# Altium PCB DAL_DPU.PcbDoc (part 2 of 3)
Units mm, origin at the board's own origin, x right, y up, seen from the top; angles counter-clockwise.
Board outline 93 x 90 mm, 4 copper layers (L1_TOP, L2_GND, L3_POWER, L4_BOT), stack 1.584 mm thick; 234 components, 146 nets, 788 pads, 889 vias.
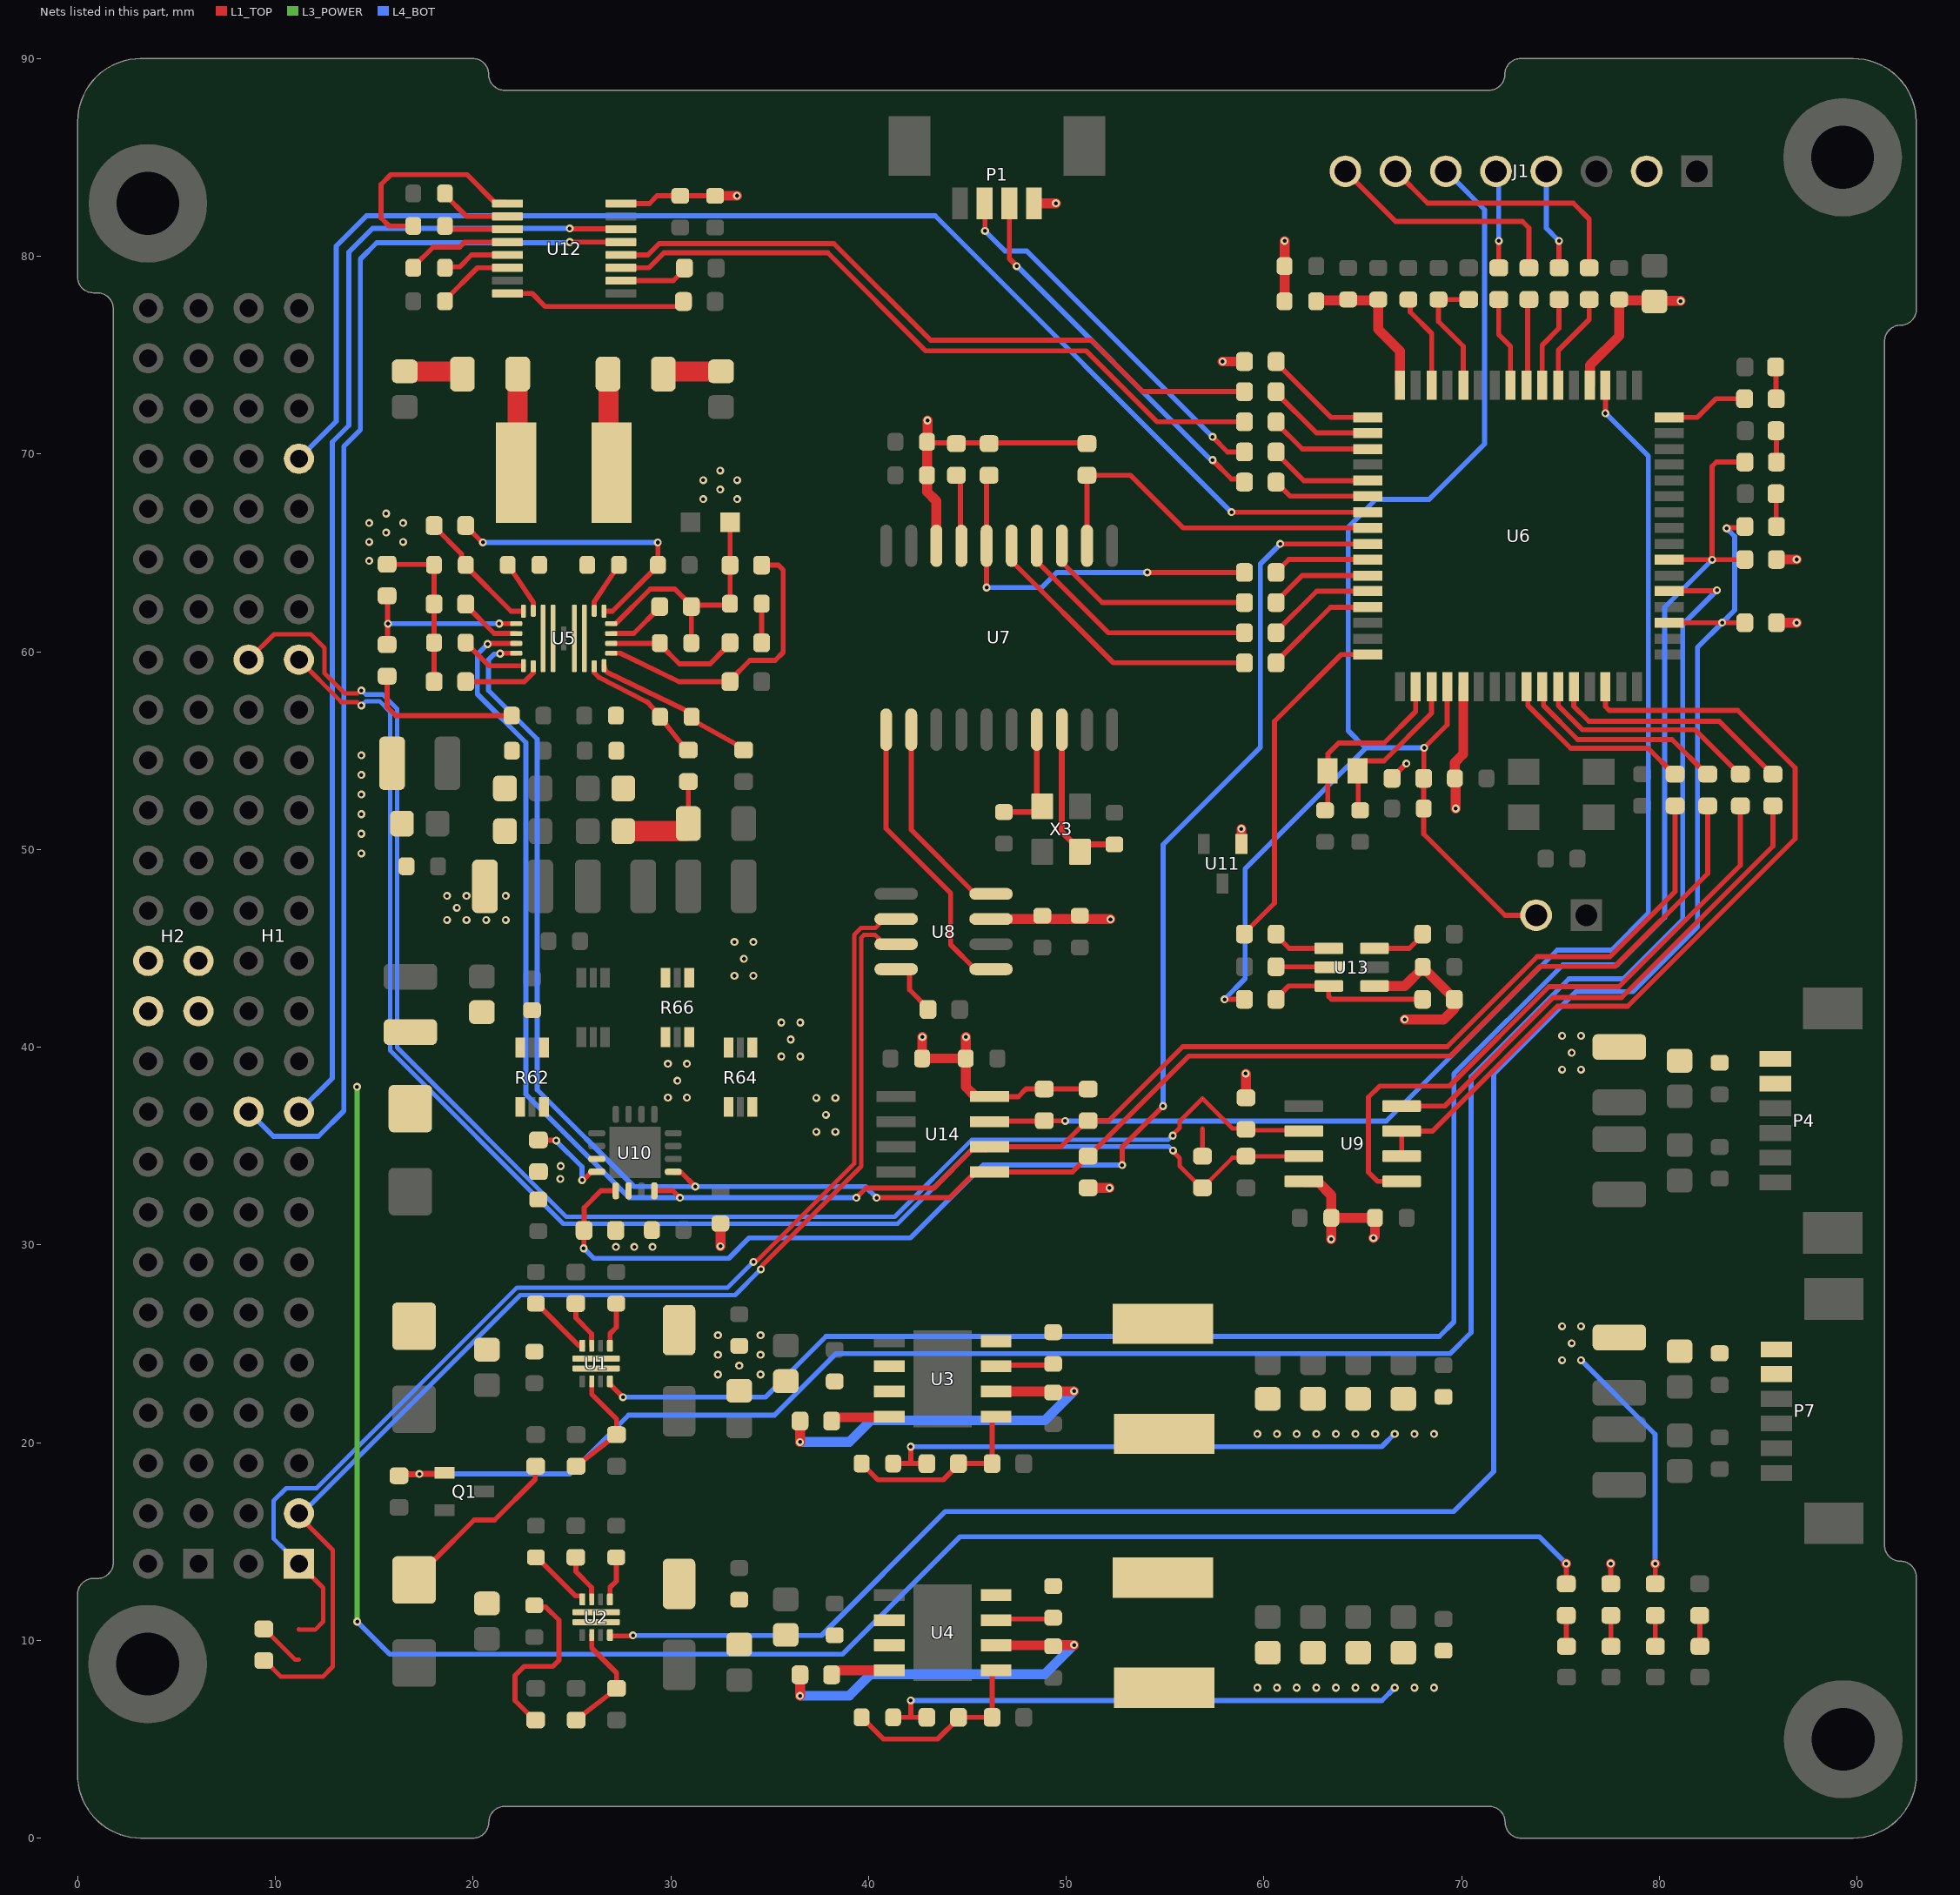
[diagram p4: the nets of this part, all layers, seen from the top]

## Part data
C1 C3 C9 C11 C15 C16 C17 C18 C20 C21 C22 C23 C31 C32 C38 C40 C42 C43 C44 C45 C50 C51 C52 C53 C65 C67 C71 C73 C77 C80 C86 C90 C92 C93 C95 C96 C98 C101 C103 C104 C106 C107: library part _CAP_C_2, "CAP", Voltage=25V
C2 C4 C5 C6 C7 C8 C10 C12 C13 C14 C19 C24 C26 C28 C35 C37 C39 C41 C46 C47 C48 C49 C54 C55 C56 C57 C58 C59 C60 C62 C63 C64 C66 C68 C69 C70 C72 C74 C75 C76 C78 C79 C81 C82 C83 C84 C85 C89 C94 C97 C100 C102 C105 C108: library part _CAP_C_2, "CAP", Voltage=50V
C25 C27 C61 C99: library part _CAP_C_2, "CAP", Voltage=20V
C29 C30: library part _CAP_C_2, "CAP", Voltage=DNP/0.1uF
C33 C34: library part _CAP_C_2, "CAP"
C36: library part _CAP_C_2, "CAP", Voltage=16V
D1 D2: library part "DIODE SCHOTTKY", "DIODE SCHOTTKY"
D3 D4 D14: library part "Diode TVS", "TVS Diode", Voltage=16V, Code - JEDEC=DO-214-AB, Published=8-Jun-2000, Publisher="Altium Limited", Revision="July-2002: Re-released for DXP Platform."
L1 L2: library part Inductor, "Inductor", Voltage=3A
L3: library part Inductor, "Inductor"
L4: library part Inductor, "Ferrite Bread"
NT1: library part NetTie_SMD, "Net Tie SMD"
P1: library part 0532610471
Q1: library part "Mosfet N", "Mosfet N", Voltage=30V
R1 R2 R3 R4 R5 R6 R7 R8 R9 R10 R11 R12 R13 R14 R15 R16 R17 R18 R19 R20 R21 R22 R23 R24 R25 R26 R27 R28 R29 R30 R31 R32 R33 R34 R35 R36 R37 R38 R39 R40 R41 R44 R45 R46 R47 R48 R49 R50 R53 R54 R55 R56 R57 R58 R59 R60 R63 R65 R67 R68 R69 R70 R71 R72 R73 R76 R78 R79 R80 R81 R82 R83 R84 R85 R86 R87 R88: library part _RES_B_2_2, "RES"
R61 R62 R64 R66: library part RSMT1316, "Shunt", Current=8A, Manufacturer 1=SUSUMU, Manufacturer Part Number 1=KRL1632E-M-R010-F-T5, Operating Temperature="-55C to +155C", Package=1206, Power=0.75W, Supplier Part Number 1=408-1570-1-ND, Temperature Coeffcient=50ppm/C, Tolerance=1%, Category=Resistor, ComponentLink1Description="SVN Datasheet", ComponentLink1URL=https://chn-vm-apps.microchip.com/mchprepo/parts/Datasheets/n_catalog_partition09_en.pdf, ComponentLink2Description="Local Datasheet", ComponentLink2URL=C:\ALTIUM_WORK\00001_MCHP-CDB\Datasheets\n_catalog_partition09_en.pdf, ComponentLink3Description="Open Symbol", ComponentLink3URL="C:\ALTIUM_WORK\00001_MCHP-CDB\Library\LibraryRefs\Shunt 4 Pin.SchLib", ComponentLink4Description="Open Footprint", ComponentLink4URL=C:\ALTIUM_WORK\00001_MCHP-CDB\Library\Footprints\RES_C_1206_SHUNT.PcbLib, ComponentLink5Description="Open Footprint 2", ComponentLink6Description="Open Footprint 3", ComponentLink7Description="Open Footprint 4", Composition=MF, Description_="RES SHUNT MF 0.01R 1% 0.75W SMD 1206", Dev Tools Status=Design, MCHP-ID=RSMT1316, Owner="Ciprian Abramov", Populated=YES, Quantity Override=1, Revision=1, Status="MCL Design", Supplier 1=Digi-Key, Symbol="Shunt 4 Pin", TYPE="RES SMD"
SB1 SB2: library part JUMPER
U5: library part TPS55289-Q1
U7: "Stand-Alone CAN Controller with SPI Interface"
X2: library part OSC_32.768kHz, "Crystal", Load Capacitance=12.5pF, Manufacturer 1=NDK, Manufacturer Part Number 1=NX2012SA-32.768K-STD-MUB-1, Supplier Part Number 1=644-1219-1-ND, Tolerance=±20ppm, Category=Crystal/Oscillator, ComponentLink1Description="SVN Datasheet", ComponentLink1URL=https://chn-vm-apps.microchip.com/mchprepo/parts/Datasheets/c_NX2012SA-STD-MUB-1_e.pdf, ComponentLink2Description="Local Datasheet", ComponentLink2URL=C:\ALTIUM_WORK\00001_MCHP-CDB\Datasheets\c_NX2012SA-STD-MUB-1_e.pdf, ComponentLink3Description="Open Symbol", ComponentLink3URL="C:\ALTIUM_WORK\00001_MCHP-CDB\Library\LibraryRefs\Crystal 2 Pins.SchLib", ComponentLink4Description="Open Footprint", ComponentLink4URL=C:\ALTIUM_WORK\00001_MCHP-CDB\Library\Footprints\CRYSTAL_NX2012SA.PcbLib, ComponentLink5Description="Open Footprint 2", ComponentLink6Description="Open Footprint 3", ComponentLink7Description="Open Footprint 4", Description_="CRYSTAL 32.768kHz 12.5pF SMD NX2012SA", Dev Tools Status=Production, MCHP-ID=OSC1092, Owner="Jamus Griego", Populated=YES, Quantity Override=1, Revision=1, Status="MCL Design", Supplier 1=Digi-Key, Symbol="Crystal 2 Pins", TYPE=Crystal
X3: library part crystal_4pin
XC1: library part A07-0042, "Fox FQ5032B 12.0MHz SMD crystal 738B-12", Manufacturer="Fox  Electronics", MPN=FQ5032B-12.000, TemperatureRange="0Â°C ~ 70Â°C", Tolerance=Â±30ppm, AN=A07-0042, Height=1,20000004768372, PartGroup="Frequency devices,Crystals,SMD"

## Via types
v1: diameter 0.4, hole 0.2, L1_TOP to L4_BOT, tented both sides, 888 vias
v2: diameter 0.4, hole 0.2, L1_TOP to L4_BOT, 1 vias

## Nets (pads, with @x,y where several pads share a name; then routed paths per layer and width w, separated by ;. In a path a pad name is that pad's centre, name@x,y a point inside that pad or via, vN(x,y) a via of type N, cw(c..) or ccw(c..) an arc to the next point about the centre after c; other vN are vias at no path point)
+5: C61.2 C62.1 C63.1 C67.1 C68.1 C71.2 C72.1 C73.2 C74.2 C75.2 C76.2 C77.2 C78.1 C79.2 C80.2 C85.2 C86.1 C89.1 C90.2 C101.2 C102.2 H2.25 H2.26 J1.2 L4.1 P1.1 R4.1 R6.1 R31.1 R48.1 R49.1 R50.1 R53.2 R54.1 R55.1 R58.2 R63.1 R65.2 R66.2 R69.2 R76.1 R80.2 U6.21 U6.52 U7.18 U8.3 U9.8 U10.2 U10.15 U11.1 U12.16 U13.1 U14.8 | length 82.7
  L1_TOP w0.254: U12.16@27.482,82.666 28.917,82.666 29.308,83.058 C80.2@30.48,83.058 C79.2@32.243,83.058 ; C67.1@42.964,70.612 43.009,70.567 46.057,70.567 R55.1@46.101,70.523 46.139,70.561 51.016,70.561 R54.1@51.054,70.523 ; U14.8@46.126,37.499 47.58,37.499 47.964,37.884 R76.1@48.895,37.884 R50.1@51.114,37.884 ; R48.1@66.485,53.594 66.485,53.631 67.194,54.34 v1(67.207,54.34) ; R80.2@77.546,12.859 v1@77.546,13.876
  L1_TOP w0.5: C79.2@32.243,83.058 v1(33.348,83.058) ; C77.2@32.512,31.077 32.512,29.93 v1(32.515,29.927) ; v1(42.727,40.511) 42.715,40.499 C86.1@42.715,39.429 C89.1@44.92,39.429 ; C67.1@42.964,70.612 C68.1@42.964,68.923 42.964,68.091 43.434,67.621 U7.18@43.434,65.356 ; C67.1@42.986,70.59 v1(42.986,71.695) ; v1(44.932,40.511) 44.92,40.499 C89.1@44.92,39.429 ; U14.8@46.126,37.499 46.097,37.529 45.385,37.529 44.92,37.994 C89.1@44.92,39.429 ; U8.3@46.202,46.482 52.23,46.482 v1(52.243,46.469) ; P1.1@48.375,82.677 v1(49.48,82.677) ; R49.1@51.114,32.889 52.185,32.889 v1(52.197,32.877) ; v1(57.912,74.676) R31.1@59.017,74.676 ; U11.1@58.862,50.276 v1(58.862,51.045) ; v1(59.083,38.661) 59.094,38.651 R58.2@59.094,37.444 ; L4.1@61.049,77.724 v1(61.049,80.772) ; U9.8@62.018,33.215 62.063,33.17 62.753,33.17 63.411,32.511 C73.2@63.411,31.369 ; v1(63.399,30.286) 63.411,30.298 C73.2@63.411,31.369 ; v1(65.543,30.352) 65.621,30.43 C74.2@65.621,31.369 C73.2@63.411,31.369 ; U13.1@65.595,43.097 67.124,43.097 C85.2@68.034,44.007 ; v1(67.124,41.402) 69.093,41.402 69.634,41.943 R69.2@69.634,42.418 ; C85.2@68.034,44.049 C85.2@68.034,44.007 ; C85.2@68.034,44.057 C85.2@68.034,44.007 ; R69.2@69.634,42.449 69.634,42.468 69.459,42.643 69.44,42.643 68.226,43.856 68.184,43.856 C85.2@68.034,44.007 ; v1(69.704,52.07) 69.704,53.594 69.655,53.642 69.655,54.392 70.088,54.824 U6.21@70.088,58.237 ; U6.52@76.489,73.477 76.493,73.481 76.493,74.492 77.978,75.978 C63.1@77.978,77.813 78.028,77.763 79.706,77.763 C61.2@79.756,77.713 ; v1(77.543,13.879) v1@77.546,13.876 ; C61.2@79.788,77.745 v1@81.068,77.745 ; R6.1@85.928,61.462 86.945,61.462 v1(86.948,61.466) ; R4.1@85.928,64.663 86.945,64.663 v1(86.948,64.666)
  other v1: 27.226,29.896 28.155,29.896 29.083,29.896 24.412,33.336 24.433,33.986 29.857,37.449 30.814,37.449 30.336,38.306 29.857,39.163 30.814,39.163 14.351,49.8 14.351,50.793 14.351,51.785 14.351,52.778 14.351,53.77 14.351,54.762 81.084,77.729
+5_SENSE: C20.1 C21.1 C22.1 C23.1 C24.1 C30.1 L2.2 R13.1 R66.1 | length 27.3
  L1_TOP w0.254: C30.1@41.251,6.107 42.062,6.107 ; v1(42.139,6.96) 42.139,6.183 42.062,6.107 ; R13.1@42.953,6.107 42.062,6.107
  L4_BOT w0.254: v1(42.139,6.96) 42.145,6.953 65.97,6.953 v1(66.621,7.605)
  other v1: 59.675,7.605 60.667,7.605 61.659,7.605 62.652,7.605 63.644,7.605 64.637,7.605 65.629,7.605 67.614,7.605 68.606,7.605 33.222,43.61 34.179,43.61 33.701,44.467 33.222,45.324 34.179,45.324
+5_SENSE_TRANS: C15.1 C16.1 C17.1 C18.1 C19.1 C29.1 L1.2 R12.1 R64.1 | length 27.3
  L1_TOP w0.254: C29.1@41.251,18.941 42.062,18.941 ; v1(42.139,19.794) 42.139,19.017 42.062,18.941 ; R12.1@42.953,18.941 42.062,18.941
  L4_BOT w0.254: v1@42.132,19.8 v1(42.139,19.794) 65.964,19.794 v1@66.615,20.445
  other v1: 59.675,20.439 60.667,20.439 61.659,20.439 62.652,20.439 63.644,20.439 64.637,20.439 65.629,20.439 66.621,20.439 67.614,20.439 68.606,20.439 35.589,39.529 36.547,39.529 36.068,40.386 35.589,41.243 36.547,41.243
+5_TRANS: C92.2 C93.2 C94.2 C103.2 C104.2 C105.2 P4.5 P4.6 P7.5 P7.6 R64.2 R78.2 | length 12.9
  L1_TOP w0.254: R78.2@79.794,12.859 v1@79.794,13.876
  L1_TOP w0.5: v1(79.791,13.879) v1@79.794,13.876
  L4_BOT w0.254: v1(76.044,24.168) 79.791,20.421 v1(79.791,13.879)
  other v1: 75.086,24.168 75.565,25.025 75.086,25.882 76.044,25.882 37.367,35.719 38.325,35.719 37.846,36.576 37.367,37.433 38.325,37.433 75.086,38.859 76.044,38.859 75.565,39.716 75.086,40.573 76.044,40.573
+12: C9.2 C10.2 C11.2 C12.2 D3.1 D4.1 R1.2 R2.2 R62.2 U1.5 U2.5 | length 17.8
  L1_TOP w0.254: D4.1@17.018,13.052 17.018,13.089 17.982,14.054 18.02,14.054 20.05,16.084 21.087,16.084 23.146,18.142 23.146,18.783 R1.2@23.166,18.803 ; C12.2@23.101,11.769 23.376,11.769 23.379,11.772 23.379,11.739 23.419,11.699 23.668,11.699 24.34,11.027 24.34,8.986 24.034,8.68 22.582,8.68 22.127,8.225 22.127,6.959 23.116,5.969 R2.2@23.166,5.969
+12_EPS: C98.2 C99.2 C100.2 D14.1 H2.23 H2.24 R62.1 R79.2 | length 92.9
  L1_TOP w0.254: R79.2@75.298,12.859 v1@75.298,13.876
  L1_TOP w0.5: v1(75.295,13.879) v1@75.298,13.876
  L3_POWER w0.254: v1(14.139,10.951) v1@14.139,37.991
  L4_BOT w0.254: v1(14.139,10.951) 15.787,9.303 38.689,9.303 44.626,15.24 73.934,15.24 v1(75.295,13.879)
  other v1: 14.135,37.995
+12_MCU: C3.2 C4.1 C27.1 C28.1 D2.1 U2.6 U4.2 U4.3
+12_TRANS: C1.2 C2.1 C25.1 C26.1 C50.2 C51.2 C52.2 C53.2 C54.2 D1.1 R23.2 U1.6 U3.2 U3.3 U5.7 | length 8
  L1_TOP w0.254: R23.2@15.653,58.763 15.653,57.209 16.093,56.769 C54.2@21.959,56.769
  other v1: 32.385,23.446 34.544,23.446 33.466,23.894 32.385,24.439 34.544,24.439 32.385,25.431 34.544,25.431 18.688,46.431 19.67,46.431 20.662,46.431 21.654,46.431 19.177,47.045 18.688,47.65 19.67,47.65 21.654,47.65
AGND: C39.1 C47.1 C48.1 C49.1 NT1.2 R25.2 R26.1 R27.1 R28.1 R30.1 U5.17 | length 21.5
  L1_TOP w0.254: R25.2@15.653,64.427 15.672,64.408 18.009,64.408 C39.1@18.028,64.389 R26.1@18.028,62.413 C47.1@18.028,60.461 R27.1@18.028,58.485 ; U5.17@26.987,61.42 U5.17@26.987,61.42 27.22,61.419 28.97,63.169 30.209,63.169 31.042,62.336 R28.1@31.042,62.286 ; C48.1@31.042,60.436 R28.1@31.042,62.286 ; NT1.2@33.004,66.548 32.998,66.542 R30.1@32.998,64.376 C49.1@32.998,62.425 32.928,62.355 31.112,62.355 R28.1@31.042,62.286
  other v1: 14.747,64.591 14.747,65.548 16.461,65.548 15.604,66.027 14.747,66.506 16.461,66.506 15.604,66.985 31.647,67.72 33.361,67.72 32.504,68.199 31.647,68.678 33.361,68.678 32.504,69.156
AVCC: C64.1 C65.1 L4.2 U6.64 | length 8
  L1_TOP w0.5: L4.2@62.649,77.724 62.693,77.768 65.741,77.768 C64.1@65.786,77.813 65.786,76.303 66.888,75.201 U6.64@66.888,73.477
CAN_H: H1.03 R57.1 U8.7 | length 61.9
  L1_TOP w0.224: R57.1@9.415,8.979 9.467,8.979 10.276,8.17 12.408,8.17 12.907,8.669 12.907,14.564 11.19,16.281 H1.03@11.19,16.42 ; v1(34.554,28.768) 34.554,28.815 34.643,28.904 34.643,28.981 39.631,33.969 39.631,45.541 39.762,45.672 40.348,45.672 40.53,45.49 40.53,45.386 40.704,45.212 U8.7@41.402,45.212
  L4_BOT w0.224: H1.03@11.19,16.42 11.339,16.42 22.382,27.463 33.25,27.463 v1(34.554,28.768)
CAN_L: H1.01 SB1.1 U8.6 | length 59.1
  L1_TOP w0.224: SB1.1@11.19,10.554 11.208,10.536 12.009,10.536 12.419,10.946 12.419,12.651 H1.01@11.19,13.88 ; v1(34.182,29.14) 34.229,29.14 34.318,29.229 34.395,29.229 39.281,34.115 39.281,45.686 39.617,46.022 40.348,46.022 40.53,46.204 40.53,46.308 40.704,46.482 U8.6@41.402,46.482
  L4_BOT w0.224: H1.01@11.176,13.88 11.176,13.894 10.537,14.533 10.523,14.533 9.904,15.152 9.904,17.054 10.545,17.695 12.079,17.695 22.226,27.841 32.883,27.841 v1(34.182,29.14)
CAN_RX: U7.2 U8.4 | length 10.4
  L1_TOP w0.254: U7.2@42.164,56.056 42.164,50.99 45.402,47.752 U8.4@46.202,47.752
CAN_TX: U7.1 U8.1 | length 14.8
  L1_TOP w0.254: U7.1@40.894,56.056 40.894,51.054 44.16,47.788 44.16,45.184 45.402,43.942 U8.1@46.202,43.942
EFUSE1_MCU_FLT: R4.2 R84.2 U1.4 U6.39 | length 100.6
  L1_TOP w0.254: U1.4@26.927,23.099 26.927,22.949 27.577,22.299 v1(27.583,22.299) ; U6.39@80.502,64.663 80.51,64.655 82.667,64.655 v1(82.674,64.647) ; R4.2@84.328,64.663 84.32,64.655 82.682,64.655 v1(82.674,64.647) ; R84.2@84.328,69.59 82.895,69.59 82.674,69.37 v1(82.674,64.647)
  L4_BOT w0.254: v1(27.583,22.299) 34.791,22.299 37.858,25.367 68.873,25.367 69.615,26.108 69.615,38.654 75.118,44.158 77.876,44.158 80.275,46.557 80.275,62.247 v1(82.674,64.647)
EFUSE2_MCU_FLT: R6.2 R82.2 U2.4 U6.35 | length 107.6
  L1_TOP w0.254: U2.4@26.925,10.271 26.925,10.22 26.936,10.21 26.948,10.222 28.065,10.222 v1(28.092,10.25) ; U6.35@80.502,61.462 80.505,61.465 83.182,61.465 v1(83.185,61.468) 83.188,61.465 84.325,61.465 R6.2@84.328,61.462 ; v1(83.409,66.238) 83.437,66.266 84.26,66.266 R82.2@84.328,66.333
  L4_BOT w0.254: v1(28.092,10.25) 37.622,10.25 43.887,16.514 69.6,16.514 71.628,18.542 71.628,38.648 75.785,42.805 78.668,42.805 81.933,46.07 81.933,60.216 v1(83.185,61.468) 83.82,62.103 83.82,65.827 v1(83.409,66.238)
HeartBeat: R83.2 U6.48 | length 4.2
  L1_TOP w0.254: U6.48@80.502,71.851 81.925,71.851 82.866,72.792 R83.2@84.314,72.792
MCU_CONSOLE_RX: P1.2 R38.2 | length 19.4
  L1_TOP w0.254: P1.2@47.125,82.677 47.125,79.875 v1(47.498,79.502) ; v1(57.404,69.691) 58.363,68.732 58.865,68.732 R38.2@59.017,68.58
  L4_BOT w0.254: v1(47.498,79.502) 47.526,79.502 57.308,69.719 57.376,69.719 v1(57.404,69.691)
MCU_CONSOLE_TX: P1.3 R36.2 | length 19.2
  L1_TOP w0.254: P1.3@45.875,82.677 45.894,82.658 v1(45.894,81.28) ; v1(57.404,70.866) 58.166,70.104 R36.2@59.017,70.104
  L4_BOT w0.254: v1(45.894,81.28) 46.91,80.264 48.006,80.264 v1(57.404,70.866)
MCU_EEPROM_WP: R76.2 U6.51 U14.7 | length 65.3
  L1_TOP w0.254: U14.7@46.126,36.229 46.154,36.257 48.868,36.257 R76.2@48.895,36.284 48.905,36.274 49.942,36.274 v1(49.952,36.263) ; v1(77.273,72.057) 77.275,72.059 77.275,73.475 U6.51@77.276,73.477
  L4_BOT w0.254: v1(49.952,36.263) 66.193,36.263 74.839,44.909 77.597,44.909 79.451,46.763 79.451,69.901 77.295,72.057 v1(77.273,72.057)
MCU_EFUSE_EN: Q1.1 R11.1 U6.37 | length 105.3
  L1_TOP w0.254: U6.37@80.502,63.063 80.526,63.087 82.896,63.087 v1(82.921,63.112)
  L1_TOP w0.305: R11.1@16.256,18.326 16.328,18.398 17.266,18.398 v1(17.285,18.416) 18.498,18.416 Q1.1@18.558,18.476
  L4_BOT w0.254: v1(17.285,18.416) 24.893,18.416 27.868,21.391 35.251,21.391 38.364,24.504 69.423,24.504 70.485,25.566 70.485,38.509 75.429,43.453 78.187,43.453 81.181,46.447 81.181,61.372 v1(82.921,63.112)
MCU_I2C_SCL: R44.2 R50.2 U5.3 U10.4 U14.6 | length 98
  L1_TOP w0.254: v1(20.737,60.385) 20.776,60.385 20.811,60.42 U5.3@22.187,60.42 ; U10.4@29.169,32.736 30.111,32.736 v1(30.464,32.383) ; v1(39.385,32.385) 39.877,32.877 43.32,32.877 45.25,34.807 45.974,34.807 U14.6@46.126,34.959 49.729,34.959 51.054,36.284 R50.2@51.114,36.284 51.164,36.284 52.158,36.284 55.897,40.023 69.269,40.023 73.825,44.579 77.508,44.579 80.799,47.87 R44.2@80.799,52.208
  L4_BOT w0.254: v1(20.737,60.385) 20.219,59.867 20.219,57.857 22.676,55.401 22.676,37.612 27.902,32.385 v1(39.385,32.385)
MCU_I2C_SDA: R45.2 R49.2 U5.4 U10.5 U14.5 | length 97.4
  L1_TOP w0.254: v1(21.367,59.9) 21.386,59.92 U5.4@22.187,59.92 ; U10.5@30.129,33.696 30.162,33.663 30.529,33.663 v1(31.242,32.95) ; v1(40.411,32.385) 44.111,32.385 45.415,33.689 U14.5@46.126,33.689 50.314,33.689 50.766,34.141 50.766,34.145 R49.2@51.11,34.489 ; R49.2@51.114,34.489 51.146,34.489 56.206,39.55 69.437,39.55 73.967,44.079 77.751,44.079 82.45,48.778 R45.2@82.45,52.208
  L4_BOT w0.254: v1(21.367,59.9) 21.348,59.881 21.072,59.881 20.786,59.595 20.786,58.038 23.241,55.583 23.241,37.846 28.137,32.95 v1(31.242,32.95) 39.846,32.95 v1(40.411,32.385)
MCU_MCP2515_CS: R35.1 R55.2 U7.16 | length 19.1
  L1_TOP w0.254: v1(45.974,63.246) 45.974,68.796 R55.2@46.101,68.923 ; v1(54.102,64.008) R35.1@59.017,64.008
  L4_BOT w0.254: v1(45.974,63.246) 48.768,63.246 49.53,64.008 v1(54.102,64.008)
MCU_MCP2515_INT: R54.2 U6.8 U7.12 | length 19.7
  L1_TOP w0.254: U7.12@51.062,64.581 51.054,64.581 U7.12@51.054,65.356 R54.2@51.054,68.923 53.251,68.923 55.911,66.263 U6.8@65.262,66.263
MCU_nRESET: C66.2 J1.6 JP1.2 R48.2 R70.1 U6.20 | length 69.5
  L1_TOP w0.254: v1(58.011,42.418) R70.1@59.017,42.418 ; U6.20@69.275,58.237 69.275,56.303 v1(68.11,55.138) 68.097,55.126 68.097,53.607 R48.2@68.085,53.594 C66.2@68.085,52.07 68.085,50.781 72.193,46.673 JP1.2@73.771,46.673
  L4_BOT w0.254: v1(58.011,42.418) 59.055,43.462 59.055,49.022 65.151,55.118 ; v1(68.11,55.138) 65.131,55.138 64.262,56.007 64.262,66.294 65.667,67.699 68.36,67.699 71.169,70.508 71.169,82.36 69.569,83.96 J1.6@69.569,84.19
MCU_PAC1934_INT: R63.2 U6.9 U10.1 | length 72.6
  L1_TOP w0.254: v1(25.597,29.827) 25.606,29.837 25.606,30.724 R63.2@25.616,30.734 25.616,31.885 26.467,32.736 U10.1@27.219,32.736 ; v1(52.832,34.036) 52.832,34.948 v1(54.903,37.019) ; v1(60.829,65.45) U6.9@65.262,65.45
  L4_BOT w0.254: v1(25.597,29.827) 26.101,29.323 32.933,29.323 33.963,30.353 42.122,30.353 45.805,34.036 v1(52.832,34.036) ; v1(54.903,37.019) 54.903,50.246 59.817,55.16 59.817,64.438 v1(60.829,65.45)
MCU_PIO_IRQ2: H1.45 U6.7 | length 70.6
  L1_TOP w0.254: v1(58.363,67.056) 58.366,67.053 65.259,67.053 U6.7@65.262,67.05
  L4_BOT w0.254: H1.45@11.19,69.76 13.081,71.651 13.081,80.518 14.605,82.042 43.377,82.042 v1(58.363,67.056)
MCU_RS232_RX: R33.2 U12.12 | length 34.9
  L1_TOP w0.254: U12.12@27.482,80.066 28.842,80.066 29.419,80.643 38.254,80.643 43.145,75.752 51.273,75.752 53.873,73.152 R33.2@59.017,73.152
MCU_RS232_TX: R34.2 U12.11 | length 35.4
  L1_TOP w0.254: U12.11@27.482,79.416 28.897,79.416 29.653,80.172 37.938,80.172 42.896,75.214 51.016,75.214 54.602,71.628 R34.2@59.017,71.628
MCU_RS485_DIR: U6.30 U9.2 U9.3 | length 42.6
  L1_TOP w0.254: U9.2@66.968,34.485 U9.3@66.968,35.587 ; U9.3@66.968,35.755 68.535,35.755 74.849,42.068 78.398,42.068 86.868,50.538 86.868,54.13 83.967,57.032 77.47,57.032 77.276,57.225 U6.30@77.276,58.237
MCU_RS485_RX: R46.2 U9.1 | length 32.3
  L1_TOP w0.254: U9.1@66.968,33.215 65.75,33.215 65.289,33.677 65.289,37.466 65.856,38.033 69.395,38.033 74.423,43.061 77.966,43.061 84.101,49.196 R46.2@84.101,52.208
MCU_RS485_TX: R47.2 U9.4 | length 26.3
  L1_TOP w0.254: U9.4@66.968,37.025 69.147,37.025 74.627,42.505 78.096,42.505 85.752,50.16 R47.2@85.752,52.208
MCU_SPI_MISO: R40.1 U7.15 | length 14.7
  L1_TOP w0.254: U7.15@47.244,65.356 47.244,64.581 52.389,59.436 R40.1@59.017,59.436
MCU_SPI_MOSI: R39.1 U7.14 | length 12.8
  L1_TOP w0.254: U7.14@48.514,65.356 48.514,64.581 52.135,60.96 R39.1@59.017,60.96
MCU_SPI_SCK: R37.1 U7.13 | length 10.9
  L1_TOP w0.254: U7.13@49.784,65.356 49.784,64.529 51.829,62.484 R37.1@59.017,62.484
MCU_TCK: R86.1 U6.57 | length 4.6
  L1_TOP w0.254: R86.1@71.882,77.813 71.882,76.037 72.476,75.444 U6.57@72.476,73.477
MCU_TDI: R87.1 U6.54 | length 5
  L1_TOP w0.254: U6.54@74.889,73.477 74.889,75.232 76.454,76.798 R87.1@76.454,77.813
MCU_TDO: R85.2 U6.55 | length 4.7
  L1_TOP w0.254: U6.55@74.076,73.477 74.076,75.505 74.93,76.359 R85.2@74.93,77.813
MCU_TEMP_ADC: C60.1 R32.2 U6.60 | length 6.4
  L1_TOP w0.254: U6.60@70.088,73.477 70.088,75.446 68.834,76.7 C60.1@68.834,77.813 69.275,77.813 R32.2@70.358,77.813
MCU_TMS: R88.1 U6.56 | length 4.4
  L1_TOP w0.254: U6.56@73.288,73.477 73.347,73.536 73.347,77.754 R88.1@73.406,77.813
MCU_TPL5010_DONE: R72.2 U6.16 | length 17.5
  L1_TOP w0.254: R72.2@59.017,45.77 60.531,47.284 60.531,56.482 63.911,59.862 U6.16@65.262,59.862
NetC5_1: C5.1 U1.7 | length 2.3
  L1_TOP w0.254: U1.7@26.927,24.899 26.927,25.517 27.243,25.833 C5.1@27.243,27.031
NetC6_1: C6.1 U2.7 | length 2.3
  L1_TOP w0.254: U2.7@26.925,12.071 26.925,12.147 26.927,12.149 26.927,12.683 27.243,12.999 C6.1@27.243,14.197
NetC7_1: C7.1 U1.10 | length 3.2
  L1_TOP w0.254: C7.1@23.179,27.031 23.229,27.031 25.361,24.899 U1.10@25.527,24.899
NetC8_1: C8.1 U2.10 | length 3.3
  L1_TOP w0.254: C8.1@23.179,14.197 23.229,14.197 25.182,12.244 25.502,12.244 25.525,12.221 U2.10@25.525,12.071
NetC13_1: C13.1 L1.1 U3.8
NetC13_2: C13.2 U3.7 | length 2.9
  L1_TOP w0.254: U3.7@46.453,23.856 46.516,23.92 49.278,23.92 C13.2@49.341,23.983
NetC14_1: C14.1 L2.1 U4.8
NetC14_2: C14.2 U4.7 | length 2.9
  L1_TOP w0.254: U4.7@46.453,11.022 46.516,11.085 49.278,11.085 C14.2@49.341,11.149
NetC29_2: C29.2 R12.2 R16.1 U3.5 | length 9.8
  L1_TOP w0.254: C29.2@39.651,18.941 39.651,18.931 39.964,18.618 39.974,18.618 40.469,18.123 43.785,18.123 44.553,18.891 R12.2@44.553,18.941 R16.1@46.255,18.941 46.255,21.143 46.428,21.316 U3.5@46.453,21.316
NetC30_2: C30.2 R13.2 R17.1 U4.5 | length 10
  L1_TOP w0.254: C30.2@39.651,6.107 39.651,6.097 39.964,5.784 39.974,5.784 40.754,5.004 43.5,5.004 44.553,6.057 R13.2@44.553,6.107 R17.1@46.255,6.107 46.255,8.309 46.428,8.482 U4.5@46.453,8.482
NetC31_1: C31.1 R14.2 U3.6 | length 19.9
  L1_TOP w0.5: v1(36.536,20.03) 36.538,20.033 R14.2@36.538,21.089 ; U3.6@46.453,22.586 49.341,22.586 49.356,22.601 v1(50.396,22.601)
  L4_BOT w0.5: v1(36.536,20.03) 39.023,20.03 40.119,21.127 48.922,21.127 v1(50.396,22.601)
NetC32_1: C32.1 R15.2 U4.6 | length 22.8
  L1_TOP w0.254: U4.6@46.453,9.752 46.479,9.727 49.315,9.727 C32.1@49.341,9.701
  L1_TOP w0.5: v1(36.536,7.196) 36.538,7.199 R15.2@36.538,8.255 ; U4.6@46.453,9.752 49.341,9.752 49.356,9.767 v1(50.396,9.767)
  L4_BOT w0.5: v1(36.536,7.196) 39.023,7.196 40.119,8.293 48.922,8.293 v1(50.396,9.767)
NetC33_1: C33.1 R18.1 | length 3
  L1_TOP w1.016: C33.1@16.542,74.179 16.684,74.172 19.343,74.172 R18.1@19.46,74.041
NetC34_1: C34.1 R19.2 | length 3
  L1_TOP w1.016: R19.2@29.626,74.041 29.743,74.172 32.402,74.172 C34.1@32.544,74.179
NetC35_2: C35.2 C38.2 C40.2 C42.2 R20.2 R21.1 U5.11 | length 6.2
  L1_TOP w0.254: C40.2@27.602,53.086 C40.2@27.912,53.396 ; R21.1@30.857,53.396 R21.1@30.89,53.429 R20.2@30.89,51.308
  L1_TOP w1.016: C42.2@27.602,50.927 30.759,50.927 30.89,51.058 R20.2@30.89,51.308
NetC36_2: C36.2 R41.2 U5.18 | length 14.9
  L1_TOP w0.254: R41.2@19.628,66.383 19.628,66.367 20.468,65.527 v1(20.502,65.527) ; U5.18@26.627,62.045 27.054,62.045 29.352,64.343 C36.2@29.352,64.389 29.348,64.394 29.348,65.518 v1(29.343,65.523)
  L4_BOT w0.254: v1(20.502,65.527) 29.339,65.527 v1(29.343,65.523)
NetC37_1: C37.1 L3.1 R18.2 U5.8 | length 5
  L1_TOP w1.016: L3.1@22.179,69.046 22.258,69.125 R18.2@22.258,74.039
NetC37_2: C37.2 U5.20 | length 2.7
  L1_TOP w0.254: C37.2@21.752,64.389 21.952,64.139 23.047,62.493 U5.20@23.047,62.07
NetC39_2: C39.2 R41.1 U5.21 | length 6.6
  L1_TOP w0.254: R41.1@18.028,66.383 18.028,66.333 19.418,64.943 19.418,64.599 C39.2@19.628,64.389 ; C39.2@19.603,64.364 21.922,62.045 U5.21@22.547,62.045
NetC41_1: C41.1 L3.2 R19.1 U5.10 | length 5.1
  L1_TOP w1.016: R19.1@26.826,74.041 26.858,74.009 26.858,69.193 L3.2@27.005,69.046
NetC41_2: C41.2 U5.19 | length 2.7
  L1_TOP w0.254: U5.19@26.127,62.07 26.132,62.086 26.132,62.52 27.209,64.139 C41.2@27.375,64.389
NetC46_1: C46.1 R21.2 U5.12 | length 6.6
  L1_TOP w0.254: U5.12@26.127,59.27 26.129,59.268 26.129,58.95 26.373,58.706 28.775,57.477 28.819,57.454 28.851,57.421 29.271,56.957 C46.1@29.458,56.707 29.658,56.457 29.795,56.285 30.628,55.241 30.87,55.045 R21.2@30.89,55.029
NetC46_2: C46.2 R24.2 U5.13 | length 8.4
  L1_TOP w0.254: U5.13@26.627,59.295 26.718,59.032 26.789,58.961 30.702,57.063 30.858,56.917 C46.2@31.058,56.707 31.258,56.457 33.428,55.241 R24.2@33.69,55.029
NetC47_2: C47.2 U5.5 | length 3.4
  L1_TOP w0.254: C47.2@19.628,60.461 19.628,60.451 19.941,60.138 19.951,60.138 20.804,59.285 22.537,59.285 U5.5@22.547,59.295
NetC48_2: C48.2 R29.2 U5.15 | length 6.8
  L1_TOP w0.254: U5.15@27.16,60.418 29.424,60.418 C48.2@29.442,60.436 29.442,60.386 30.439,59.389 31.988,59.389 32.786,60.186 R29.2@33.198,60.186
NetC49_2: C49.2 R29.1 | length 2
  L1_TOP w0.254: R29.1@34.598,60.449 C49.2@34.598,62.425
NetC57_2: C57.2 U6.18 X2.2 | length 9.5
  L1_TOP w0.254: C57.2@63.094,51.981 63.234,52.121 X2.2@63.234,53.988 ; X2.2@63.24,53.994 63.24,54.842 63.783,55.385 66.08,55.385 67.675,56.979 U6.18@67.675,58.237
NetC58_1: C58.1 U6.62 | length 4.8
  L1_TOP w0.254: C58.1@67.31,77.813 67.398,77.725 67.398,77.181 68.488,76.091 U6.62@68.488,73.477
NetC59_2: C59.2 U6.19 X2.1 | length 8.4
  L1_TOP w0.254: C59.2@64.872,51.981 64.769,52.084 64.769,53.951 X2.1@64.745,53.975 64.745,54.102 65.123,54.481 66.076,54.481 68.485,56.889 68.485,58.234 U6.19@68.488,58.237
NetC81_2: C81.2 U12.2 | length 3.7
  L1_TOP w0.254: C81.2@18.58,83.174 18.58,83.107 19.671,82.016 U12.2@21.742,82.016
NetC82_1: C82.1 U12.1 | length 10.7
  L1_TOP w0.254: C82.1@16.98,81.534 15.757,81.534 15.351,81.94 15.351,83.635 15.843,84.126 19.697,84.126 21.079,82.744 21.664,82.744 U12.1@21.742,82.666
NetC82_2: C82.2 U12.3 | length 3.2
  L1_TOP w0.254: C82.2@18.58,81.534 18.748,81.366 U12.3@21.742,81.366
NetC83_1: C83.1 U12.4 | length 5.3
  L1_TOP w0.254: C83.1@16.98,79.416 16.98,79.466 17.982,80.468 19.333,80.468 19.581,80.716 U12.4@21.742,80.716
NetC83_2: C83.2 U12.5 | length 3.4
  L1_TOP w0.254: C83.2@18.58,79.416 18.63,79.466 19.323,79.466 19.923,80.066 U12.5@21.742,80.066
NetC84_2: C84.2 U12.6 | length 3.9
  L1_TOP w0.254: C84.2@18.58,77.724 18.58,77.774 20.222,79.416 U12.6@21.742,79.416
NetD7_2: D7.2 R78.1 | length 1.6
  L1_TOP w0.254: R78.1@79.794,11.259 79.8,11.253 79.8,9.702 D7.2@79.807,9.696
NetD8_2: D8.2 R79.1 | length 1.6
  L1_TOP w0.254: R79.1@75.298,11.259 75.305,11.253 75.305,9.702 D8.2@75.311,9.696
NetD9_2: D9.2 R80.1 | length 1.6
  L1_TOP w0.254: R80.1@77.546,11.259 77.553,11.253 77.553,9.702 D9.2@77.559,9.696
NetD10_2: D10.2 R81.1 | length 1.6
  L1_TOP w0.254: R81.1@82.042,11.259 82.048,11.253 82.048,9.702 D10.2@82.055,9.696
NetD11_2: D11.2 R82.1 | length 1.7
  L1_TOP w0.254: D11.2@85.903,67.99 85.915,67.978 85.915,66.346 R82.1@85.928,66.333
NetD12_2: D12.2 R83.1 | length 1.6
  L1_TOP w0.254: D12.2@85.883,74.398 85.899,74.382 85.899,72.808 R83.1@85.914,72.792
NetD13_2: D13.2 R84.1 | length 1.6
  L1_TOP w0.254: D13.2@85.903,71.176 85.928,71.151 R84.1@85.928,69.59
NetJ1_4: J1.4 R85.1 | length 5.2
  L1_TOP w0.254: R85.1@74.93,79.413 v1(74.93,80.772)
  L4_BOT w0.254: J1.4@74.283,84.298 74.283,81.419 v1(74.93,80.772)
NetJ1_5: J1.5 R86.2 | length 4.9
  L1_TOP w0.254: R86.2@71.882,79.413 v1(71.882,80.772)
  L4_BOT w0.254: J1.5@71.743,84.298 71.882,84.159 v1(71.882,80.772)
NetJ1_7: J1.7 R87.2 | length 13.3
  L1_TOP w0.254: J1.7@66.663,84.298 68.28,82.68 75.65,82.68 76.454,81.877 R87.2@76.454,79.413
NetJ1_8: J1.8 R88.2 | length 12.5
  L1_TOP w0.254: J1.8@64.123,84.298 66.662,81.758 73.076,81.758 73.406,81.428 R88.2@73.406,79.413
NetR7_1: R7.1 U1.9 | length 2.5
  L1_TOP w0.254: R7.1@25.198,27.031 25.198,26.309 26,25.508 26,24.901 U1.9@26.002,24.899
NetR8_1: R8.1 U2.9 | length 2.5
  L1_TOP w0.254: R8.1@25.198,14.197 25.198,13.475 26,12.674 U2.9@26,12.071
NetR14_1: R14.1 U3.4 | length 3
  L1_TOP w0.5: R14.1@38.138,21.089 38.138,21.106 38.313,21.281 U3.4@41.018,21.281
NetR15_1: R15.1 U4.4 | length 3
  L1_TOP w0.508: R15.1@38.138,8.255 38.138,8.305 38.309,8.476 38.601,8.476 38.607,8.482 U4.4@41.053,8.482
NetR22_1: R22.1 R30.2 U5.14 | length 15
  L1_TOP w0.254: U5.14@26.987,59.92 27.453,59.92 30.415,58.485 R22.1@32.998,58.485 32.998,58.555 34.005,59.562 35.278,59.562 35.687,59.972 35.687,64.135 35.446,64.376 R30.2@34.598,64.376
NetR23_1: R23.1 R25.1 U5.1 | length 8.8
  L1_TOP w0.254: R23.1@15.653,60.363 15.675,60.385 15.675,61.395 v1(15.697,61.417) 15.675,61.439 15.675,62.805 R25.1@15.653,62.827 ; v1(21.327,61.422) 21.95,61.422 U5.1@22.014,61.422
  L4_BOT w0.254: v1(15.697,61.417) 15.7,61.42 21.325,61.42 v1(21.327,61.422)
NetR26_2: R26.2 U5.2 | length 3.2
  L1_TOP w0.254: R26.2@19.628,62.413 19.628,62.363 21.071,60.92 U5.2@22.187,60.92
NetR27_2: R27.2 U5.6 | length 3.9
  L1_TOP w0.254: R27.2@19.628,58.485 22.595,58.485 23.047,58.937 U5.6@23.047,59.27
NetR28_2: R28.2 U5.16 | length 3.1
  L1_TOP w0.254: U5.16@26.987,60.92 28.126,60.92 29.442,62.236 R28.2@29.442,62.286
NetR31_2: R31.2 U6.1 | length 5.8
  L1_TOP w0.254: R31.2@60.617,74.676 60.617,74.626 63.392,71.851 U6.1@65.262,71.851
NetR33_1: R33.1 U6.2 | length 5.5
  L1_TOP w0.254: R33.1@60.617,73.152 60.617,73.102 62.655,71.064 U6.2@65.262,71.064
NetR34_1: R34.1 U6.3 | length 5.2
  L1_TOP w0.254: R34.1@60.617,71.628 60.617,71.578 61.944,70.251 U6.3@65.262,70.251
NetR35_2: R35.2 U6.10 | length 4.9
  L1_TOP w0.254: R35.2@60.617,64.008 60.617,64.012 61.268,64.663 U6.10@65.262,64.663
NetR36_1: R36.1 U6.5 | length 5.3
  L1_TOP w0.254: R36.1@60.617,70.104 60.617,70.054 62.02,68.651 U6.5@65.262,68.651
NetR37_2: R37.2 U6.11 | length 5.2
  L1_TOP w0.254: R37.2@60.617,62.484 60.617,62.534 61.933,63.85 U6.11@65.262,63.85
NetR38_1: R38.1 U6.6 | length 4.9
  L1_TOP w0.254: R38.1@60.617,68.58 60.617,68.576 60.908,68.285 60.912,68.285 61.334,67.863 U6.6@65.262,67.863
NetR39_2: R39.2 U6.12 | length 5.5
  L1_TOP w0.254: R39.2@60.617,60.96 60.617,61.01 62.67,63.063 U6.12@65.262,63.063
NetR40_2: R40.2 U6.13 | length 5.8
  L1_TOP w0.254: R40.2@60.617,59.436 60.617,59.486 63.381,62.25 U6.13@65.262,62.25
NetR44_1: R44.1 U6.25 | length 9.9
  L1_TOP w0.254: U6.25@73.288,58.237 73.355,58.17 73.355,57.282 75.521,55.116 79.44,55.116 80.749,53.808 R44.1@80.799,53.808
NetR45_1: R45.1 U6.26 | length 10.7
  L1_TOP w0.254: U6.26@74.076,58.237 74.142,58.17 74.142,57.282 75.867,55.557 80.651,55.557 82.4,53.808 R45.1@82.45,53.808
NetR46_1: R46.1 U6.27 | length 11.6
  L1_TOP w0.254: U6.27@74.889,58.237 74.889,57.267 76.109,56.047 81.812,56.047 84.051,53.808 R46.1@84.101,53.808
NetR47_1: R47.1 U6.28 | length 12.5
  L1_TOP w0.254: U6.28@75.676,58.237 75.676,57.242 76.443,56.475 83.035,56.475 85.702,53.808 R47.1@85.752,53.808
NetR53_1: R53.1 U7.17 | length 3.7
  L1_TOP w0.254: U7.17@44.65,65.41 R53.1@44.65,68.723
  L1_TOP w0.305: R53.1@44.45,68.923 R53.1@44.65,68.723 ; U7.17@44.65,65.41 U7.17@44.704,65.356
NetR56_2: R56.2 U8.8 | length 3
  L1_TOP w0.254: U8.8@41.402,43.942 41.915,43.942 42.075,43.782 42.075,42.9 43.015,41.96 R56.2@43.015,41.91
NetR57_2: R57.2 SB1.2 | length 2.4
  L1_TOP w0.224: R57.2@9.415,10.579 9.452,10.579 11.014,9.017 SB1.2@11.19,9.017
NetR59_2: R59.2 SB2.1 | length 1.4
  L1_TOP w0.254: R59.2@56.894,34.485 SB2.1@56.894,35.869
NetR65_1: R65.1 U10.16 | length 4.4
  L1_TOP w0.254: R65.1@23.297,35.306 23.312,35.291 24.191,35.291 v1(24.206,35.276) ; v1(25.519,33.276) 25.547,33.304 25.597,33.304 25.989,33.696 U10.16@26.259,33.696
  L4_BOT w0.254: v1(24.206,35.276) 24.206,35.255 25.507,33.954 v1@25.507,33.288
NetR67_2: R67.2 U12.8 | length 9.3
  L1_TOP w0.254: U12.8@21.742,78.116 22.987,78.116 23.644,77.459 30.39,77.459 R67.2@30.643,77.712
NetR68_2: R68.2 U12.10 | length 3.5
  L1_TOP w0.254: U12.10@27.482,78.766 30.13,78.766 30.696,79.332 R68.2@30.696,79.404
NetR69_1: R69.1 R70.2 U13.6 | length 8.3
  L1_TOP w0.254: R70.2@60.617,42.418 60.617,42.461 61.253,43.097 U13.6@63.285,43.097 63.274,43.085 63.274,42.567 63.423,42.418 R69.1@68.034,42.418
NetR71_2: R71.2 U13.3 | length 2.8
  L1_TOP w0.254: U13.3@65.595,44.997 67.361,44.997 68.034,45.67 R71.2@68.034,45.72
NetR72_1: R72.1 U13.4 | length 3
  L1_TOP w0.254: R72.1@60.617,45.72 60.617,45.67 61.29,44.997 U13.4@63.285,44.997
NetR73_2: R73.2 U13.5 | length 2.7
  L1_TOP w0.254: R73.2@60.617,44.069 60.628,44.058 63.274,44.058 U13.5@63.285,44.047
OSC1: C70.1 U7.8 X3.3 | length 8.4
  L1_TOP w0.305: U7.8@49.784,56.056 49.774,56.046 49.774,50.899 X3.3@50.692,49.981 ; X3.3@50.692,49.881 51.065,50.254 C70.1@52.441,50.254
OSC2: C69.1 U7.7 X3.1 | length 6
  L1_TOP w0.305: C69.1@46.853,51.892 48.503,51.892 X3.1@48.792,52.181 48.514,52.459 U7.7@48.514,56.056
OVLO_1: R3.1 R9.2 U1.2 | length 5.8
  L1_TOP w0.254: R3.1@25.211,18.803 25.473,19.016 26.951,20.158 26.993,20.191 R9.2@27.255,20.403 27.255,21.187 26.002,22.441 U1.2@26.002,23.099
OVLO_2: R5.1 R10.2 U2.2 | length 5.8
  L1_TOP w0.254: R5.1@25.211,5.969 25.473,6.182 26.951,7.324 26.993,7.357 R10.2@27.255,7.569 27.255,8.353 26.002,9.607 26.002,10.218 26,10.22 U2.2@26,10.271
PC104_RS232_RXD: H1.19 U12.14 | length 58.8
  L1_TOP w0.254: v1(24.892,81.407) 24.913,81.386 27.462,81.386 U12.14@27.482,81.366
  L4_BOT w0.254: H1.19@11.19,36.74 12.883,38.433 12.883,70.607 13.719,71.443 13.719,80.209 14.917,81.407 v1(24.892,81.407)
PC104_RS232_TXD: H1.20 U12.13 | length 62.8
  L1_TOP w0.254: v1(24.892,80.716) U12.13@27.482,80.716
  L4_BOT w0.254: H1.20@8.65,36.74 9.897,35.493 12.172,35.493 13.462,36.783 13.462,70.383 14.298,71.219 14.298,79.855 15.132,80.688 24.864,80.688 v1(24.892,80.716)
PC104_RS485_A: H1.38 R58.1 SB2.2 U9.6 | length 80.4
  L1_TOP w0.224: H1.38@8.65,59.6 9.935,60.885 11.79,60.885 12.491,60.184 12.491,58.911 13.52,57.883 14.147,57.883 14.303,58.039 v1(14.351,58.039) ; v1(55.391,35.523) 55.391,35.571 55.74,35.921 55.74,36.252 SB2.2@56.894,37.406 58.414,35.885 59.052,35.885 R58.1@59.094,35.844 59.138,35.799 61.973,35.799 U9.6@62.018,35.755
  L4_BOT w0.224: v1(14.351,58.039) 14.367,58.039 14.57,57.835 15.434,57.835 16.156,57.113 16.156,39.978 24.711,31.423 41.329,31.423 45.23,35.324 55.172,35.324 55.371,35.523 v1(55.391,35.523)
PC104_RS485_B: H1.37 R59.1 R60.1 U9.7 | length 76.3
  L1_TOP w0.224: H1.37@11.19,59.6 13.334,57.456 14.132,57.456 14.306,57.281 v1(14.351,57.281) ; v1(55.407,34.774) 55.407,34.726 55.74,34.393 55.74,33.988 56.844,32.885 R59.1@56.894,32.885 58.414,34.405 59.014,34.405 R60.1@59.094,34.485 U9.7@62.018,34.485
  L4_BOT w0.224: v1(14.351,57.281) 14.367,57.281 14.57,57.485 15.289,57.485 15.805,56.968 15.805,39.833 24.565,31.073 41.475,31.073 45.375,34.973 55.187,34.973 55.387,34.774 v1(55.407,34.774)